# Altium PCB PCB1.PcbDoc (part 2 of 3)
Units mil, origin at the board's own origin, x right, y up, seen from the top; angles counter-clockwise.
Board outline 4173.23 x 3149.71 mil, 2 copper layers (Top Layer, Bottom Layer); 88 components, 73 nets, 388 pads, 166 vias.
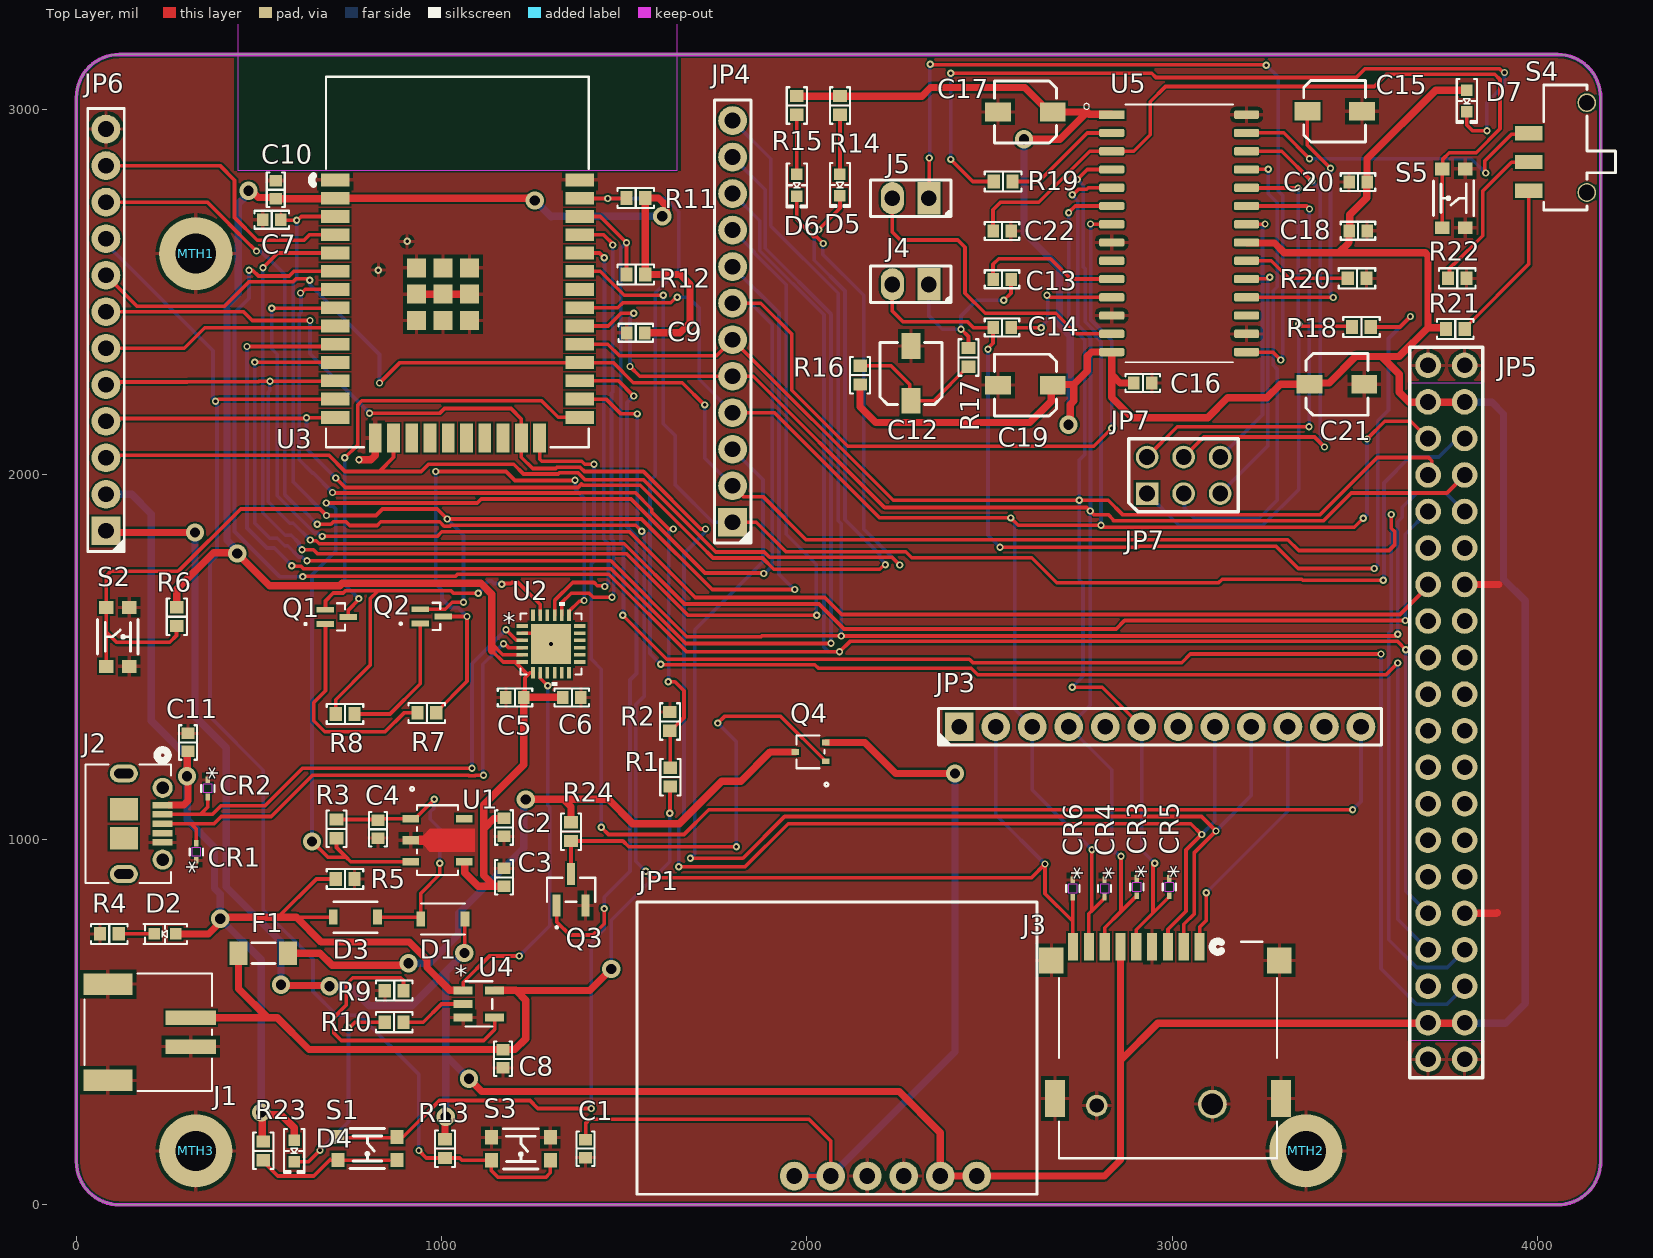
[diagram p0: Top Layer view]

## Via types
v1: diameter 20, hole 10, Top Layer to Bottom Layer, 146 vias
v2: diameter 50, hole 28, Top Layer to Bottom Layer, 20 vias

## Nets (pads, with @x,y where several pads share a name; then routed paths per layer and width w, separated by ;. In a path a pad name is that pad's centre, name@x,y a point inside that pad or via, vN(x,y) a via of type N, cw(c..) or ccw(c..) an arc to the next point about the centre after c; other vN are vias at no path point) (continued)
"CD SW1": (continued)
  Top Layer w10: JP6.10@81.02,2745.2 358.91,2745.2 418.07,2686.04 418.07,2685.34 477.34,2626.06 478.05,2626.06 v1(492.94,2611.17) ; v1(659.65,1863.13) 696.83,1863.13 703.7,1870 738.18,1870 748.18,1860 823.65,1860 833.65,1870 994.59,1870 1006.72,1857.87 1023.28,1857.87 1025.65,1860.24 1531.61,1860.24 v1(1547.51,1844.33) ; U3.26@1377.95,2205.91 1450.25,2205.91 1490.8,2165.35 v1(1535.43,2165.35) ; v1(1559.06,913.39) 1576.77,895.67 2614.86,895.67 v1(2652.1,932.91) 2652.1,851.84 2726.38,777.56 ; CR6.2@2728.39,840.63 2728.39,707.08 J3.9@2728.74,706.73
  Bottom Layer w10: v1(492.94,2611.17) 503.77,2611.17 521,2593.94 524.06,2593.94 570,2547.99 570,1945 611.54,1903.46 619.65,1903.46 659.65,1863.46 v1(659.65,1863.13) ; v1(1535.43,2165.35) 1535.43,1859.12 1547.51,1847.04 v1(1547.51,1844.33) 1555.12,1836.72 1555.12,1393.19 1531.5,1369.57 1531.5,940.94 v1(1559.06,913.39) ; JP3.2@2516.93,1309.06 2516.93,1068.08 v1(2652.1,932.91)